# Altium PCB PCB1.PcbDoc
Units mm, origin at the board's own origin, x right, y up, seen from the top; angles counter-clockwise.
Board outline 50.18 x 50.38 mm, 2 copper layers (Top Layer, Bottom Layer); 24 components, 18 nets, 63 pads, 6 vias.
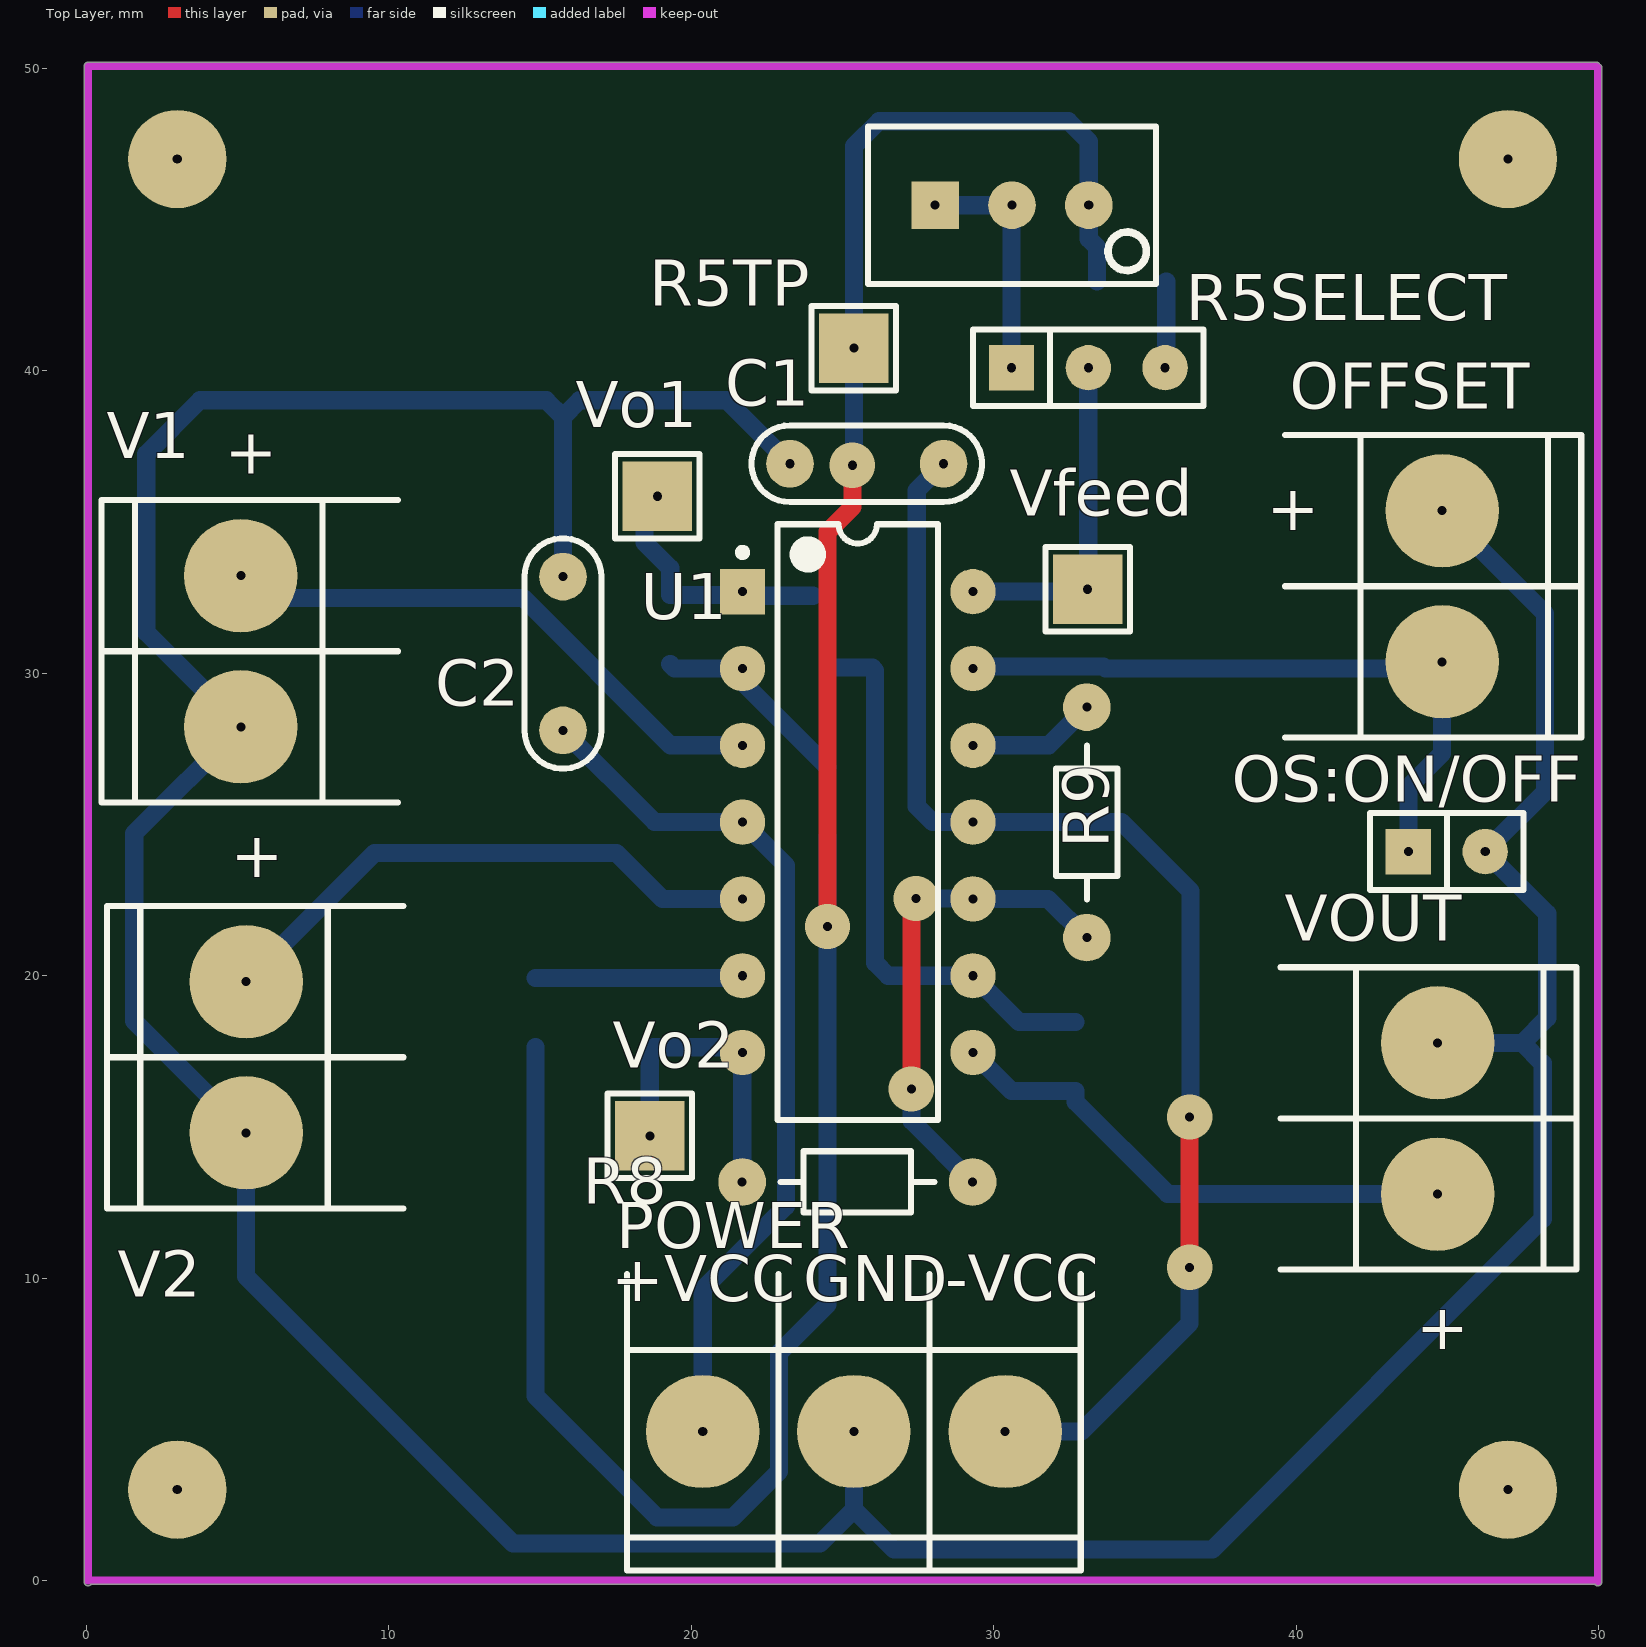
[diagram p0: Top Layer view]
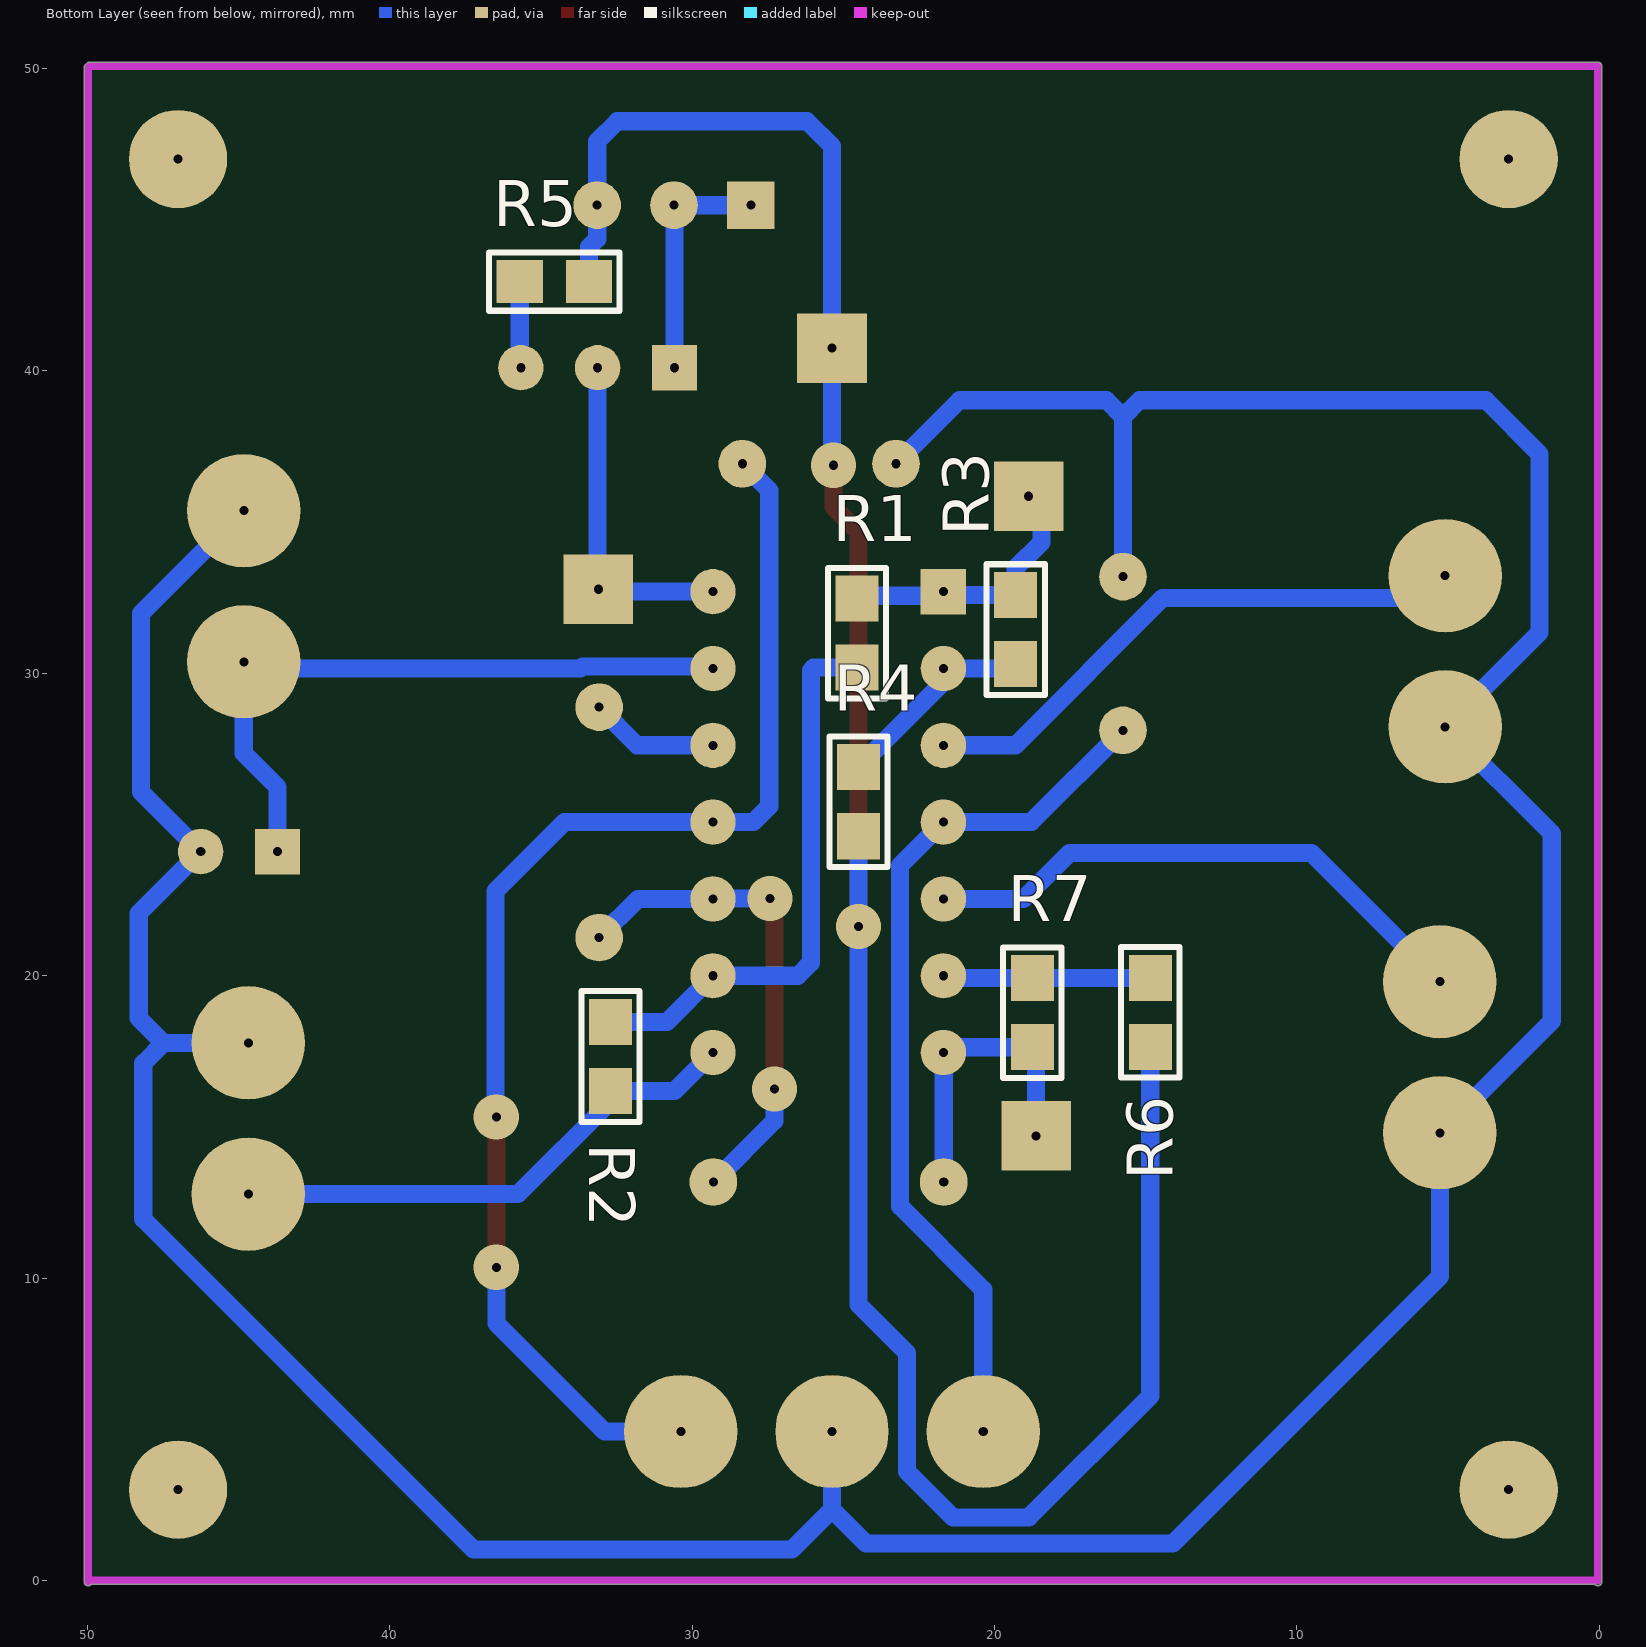
[diagram p1: Bottom Layer view, seen from below]
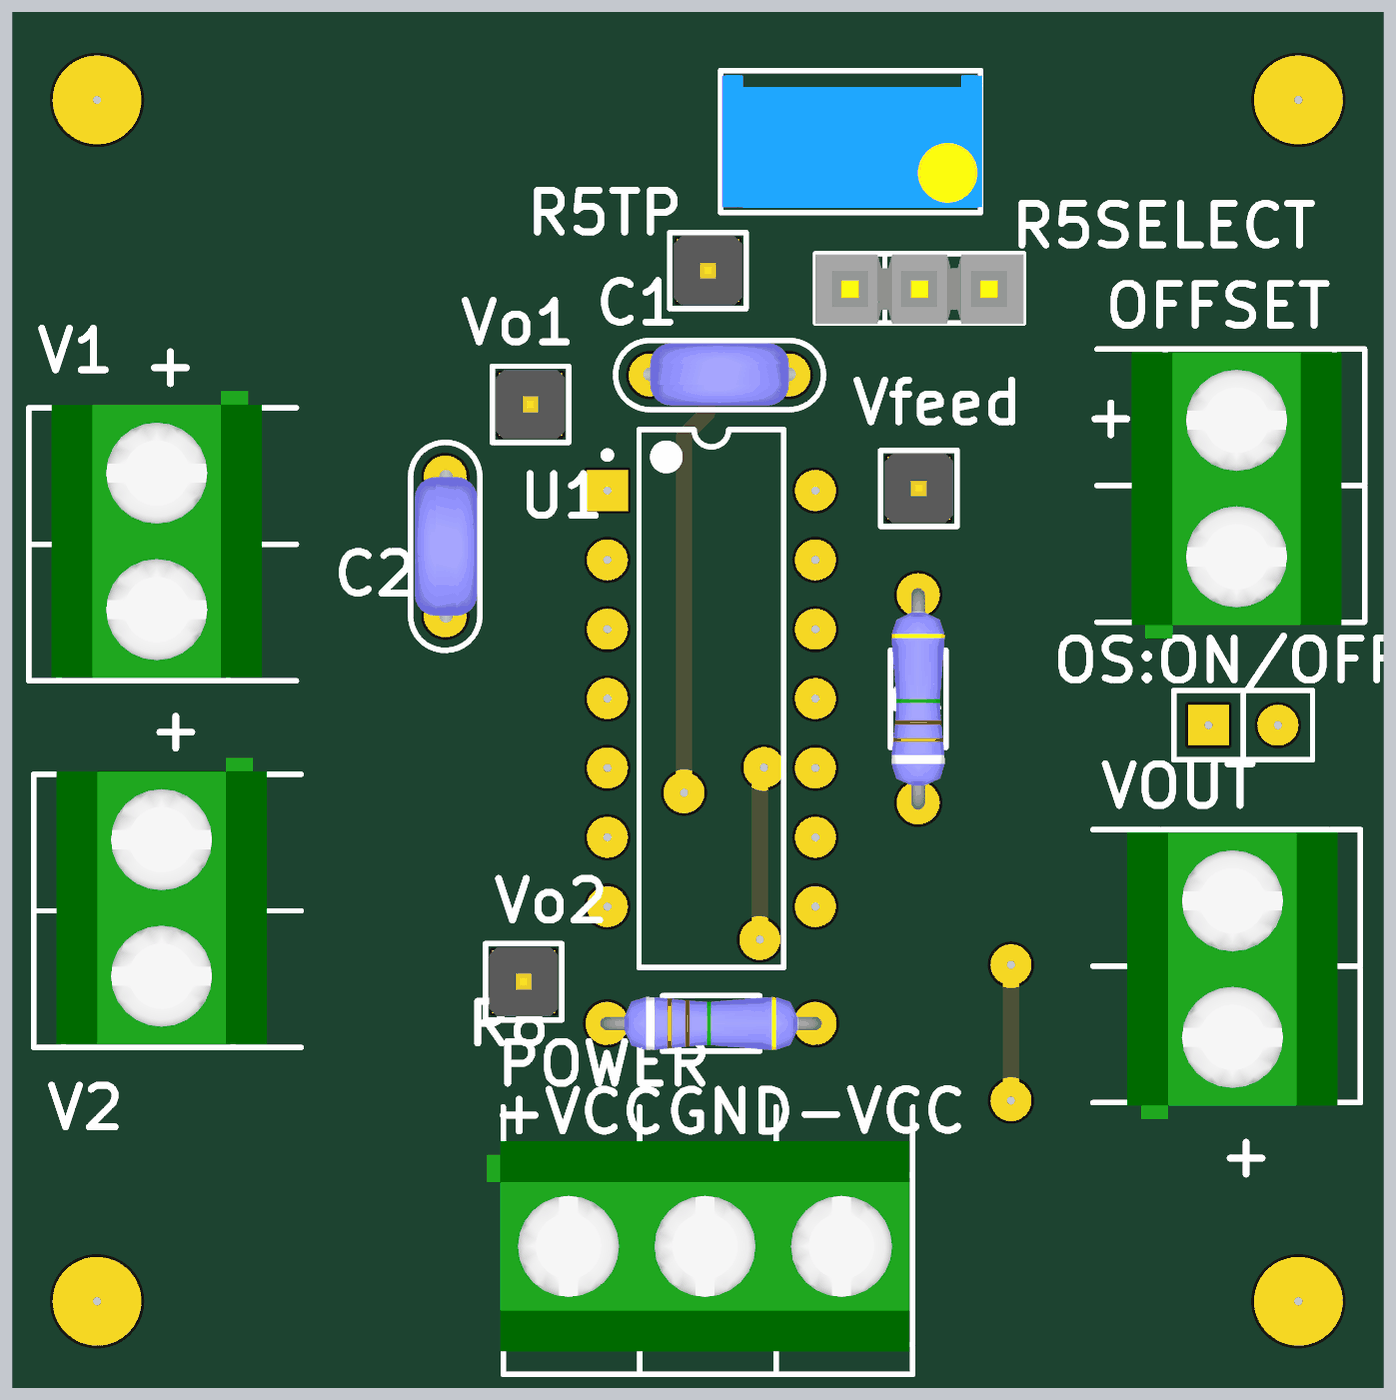
[diagram p2: 3D render of the assembled board from above, using the file's embedded part models]
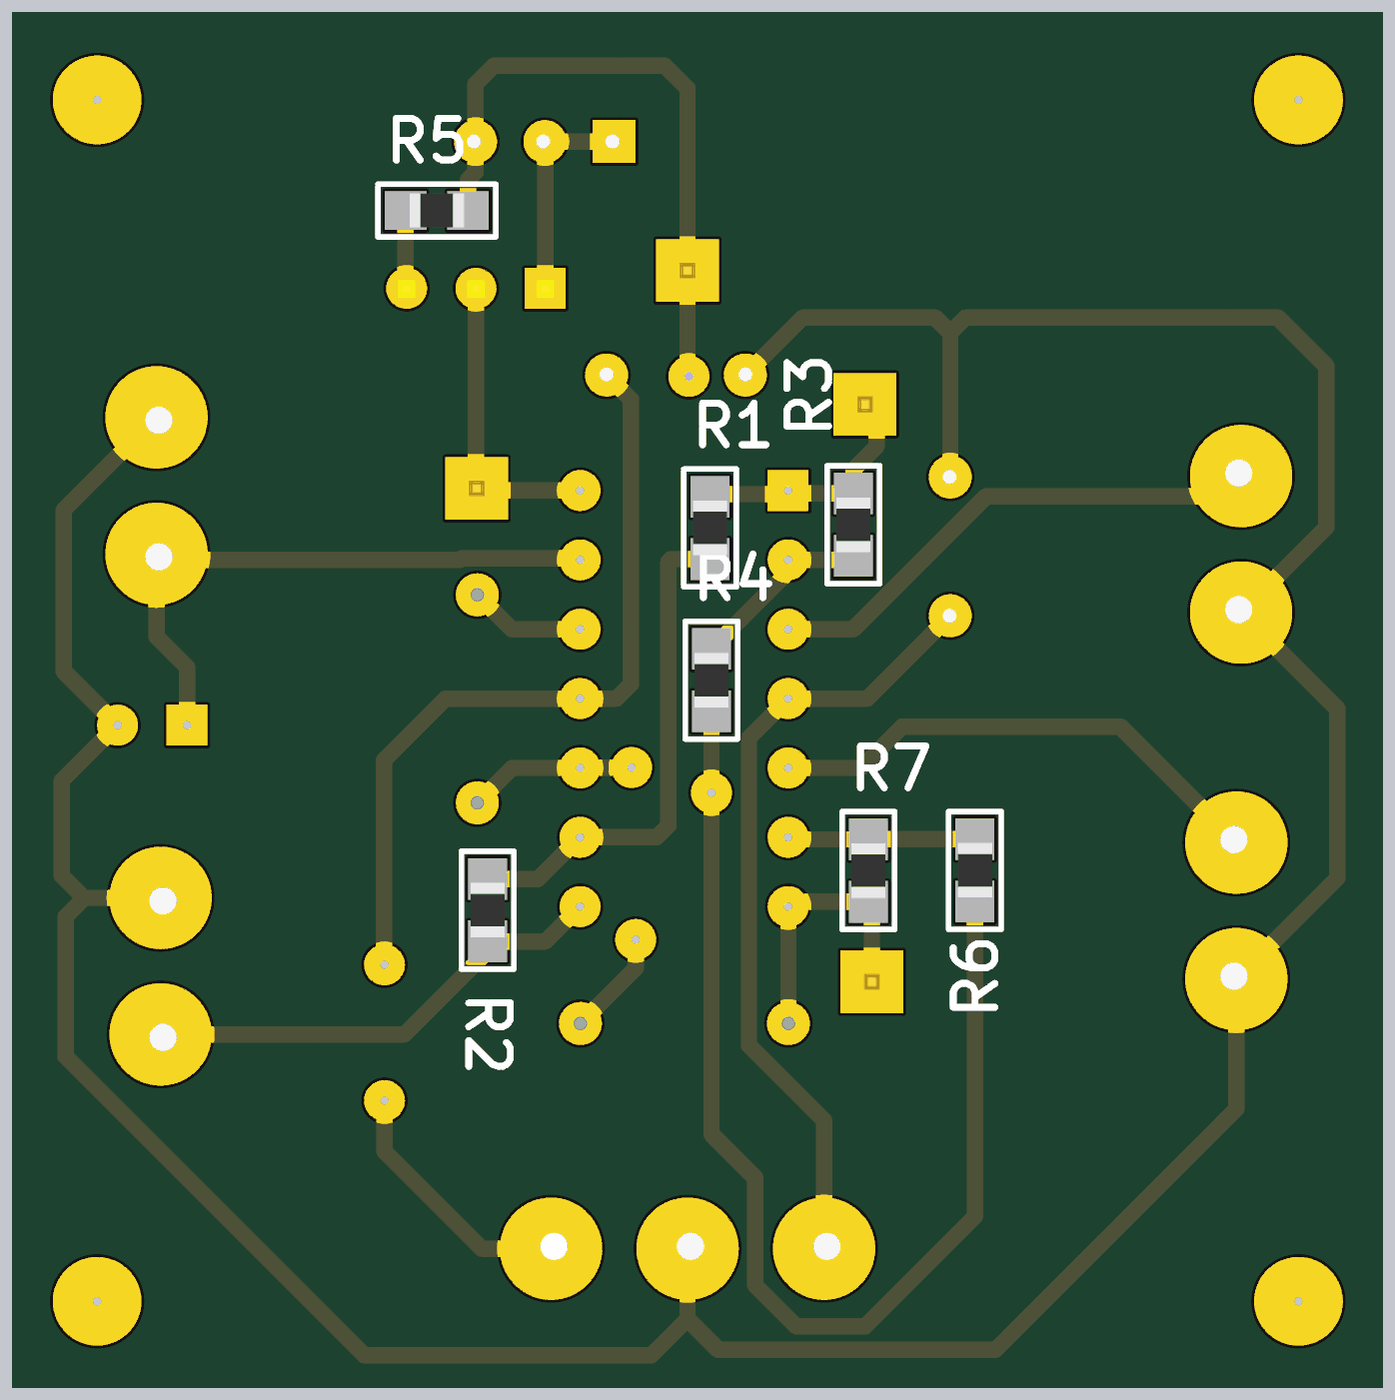
[diagram p3: 3D render of the assembled board from below, using the file's embedded part models]

## Layer stack, top to bottom
Top Solder: solder mask 0.0102, Solder Resist, Dk 3.5
Top Layer: signal copper 0.0356
Dielectric 1: dielectric 0.32, FR-4, Dk 4.8
Bottom Layer: signal copper 0.0356
Bottom Solder: solder mask 0.0102, Solder Resist, Dk 3.5

## Board outline
-0.077,-0.05 ccw(c0.05,-0.05) 0.151,-0.127 49.872,-0.127 49.885,-0.14 ccw(c49.975,-0.05) 50.102,-0.05 50.102,50.025 ccw(c49.975,50.025) 50.065,50.115 50.015,50.165 ccw(c49.925,50.075) 49.925,50.202 0.05,50.202 ccw(c0.05,50.075) -0.077,50.075

## Design rules (kind name [scope] priority, off if disabled: settings)
Clearance [All] p1: gap=0.254 ignorepadtopadclearanceinfootprint=FALSE except(0: Arc-Hole Track-Hole SMDPad-Hole THPad-Hole Via-Hole Fill-Hole Poly-Hole Region-Hole Text-Hole)
PolygonConnect [All] p1: connectstyle=Relief reliefconductorwidth=0.254 reliefentries=4 polygonreliefangle="90 Angle" airgapwidth=0.254
RoutingVias [All] p1: holewidth=0.711 width=1.27 viastyle="Through Hole" minholewidth=0.711 minwidth=1.27 maxholewidth=0.711 maxwidth=1.27
SolderMaskExpansion [All] p1: expansion=0.102
Width [All] p1: maxlimit=0.6 minlimit=0.6 preferedwidth=0.6
30 further rules are at their usual default settings.

## Components (designator, comment, footprint, x,y, rotation, side; value= is the part's Value field where it differs from the comment)
C1 "CAP" CAP200 25.8,36.925 r180 top
C2 "CAP" CAP200 15.754,30.65 r90 top
OFFSET "OFFSET" BORNERA2 44.825,32.875 r180 top
OS:ON/OFF "OS:ON/OFF" SIP2 44.98,24.1 r0 top
POWER "BORNERA 3" BORNERA3 25.375,4.925 r90 top
R1 "RES" 0805 24.55,31.325 r270 bottom
R2 "RES" 0805 32.7,17.325 r270 bottom
R3 "RES" 0805 19.3,31.443 r90 bottom
R4 "RES" 0805 24.5,25.75 r90 bottom
R5 "RES" 0805 34.557,42.95 r180 bottom
R5SELECT "POT/R5" SIP3 33.125,40.1 r0 top (schematic designator J5)
R5TP "TP" TPTH 25.375,40.75 r90 top
R6 "RES" 0805 14.85,18.782 r270 bottom
R7 "RES" 0805 18.75,18.775 r90 bottom
R8 "RES" RES300 21.68,13.175 r0 top
R9 "RES" RES300 33.075,21.255 r90 top
U1 "TL084ACN" TI-N14 25.501,25.075 r0 top locked
V1 "BORNERA 2" BORNERA2 5.1,30.725 r0 top
V2 "BORNERA 2" BORNERA2 5.275,17.3 r0 top
Vfeed "TP" TPTH 33.1,32.775 r90 top
Vo1 "TP" TPTH 18.875,35.85 r0 top
Vo2 "TP" TPTH 18.625,14.7 r0 top
VOUT "BORNERA 2" BORNERA2 44.675,15.275 r180 top
? "PRESET" "PRESET V" 30.6,45.475 r0 top

## Footprints (in the part's own frame and the unit in brackets; to place one, negate y for a bottom-side part, rotate by r counter-clockwise, add the part's x,y. Pads: shape width x height; smd on the part's side, far side on the other; paste and mask are expansions set on the pad)
0805 [mil] "Pasivo 0805"
  rect 60x56 smd: 1(-45,0) 2(45,0)
  silkscreen extent -85,-38 85,38, body extent -39,-25 39,25, height 15
BORNERA2 [mm] "Bornera con Tornillos 5mm separación"
  round 3.75 hole 0.3: 1(0,2.5) 2(0,-2.5)
  silkscreen extent -4.6,-5 5.2,5, body extent -3.76,-4.89 3.94,5.61, height 10
BORNERA3 [mm] "Bornera con Tornillos 5mm separación"
  round 3.75 hole 0.3: 1(0,5) 2(0,0) 3(0,-5)
  silkscreen extent -4.6,-7.5 5.2,7.5, body extent -3.76,-7.39 3.94,8.11, height 10.05
CAP200 [mil]
  round 62 hole 11.81: 1(-100,0) 2(100,0)
  silkscreen extent -150,-50 150,50, body extent -110,-46 110,44, height 246
"PRESET V" [mil]
  rect 62x62 hole 11.81: 1(-100,0)
  round 62 hole 11.81: 2(0,0) 3(100,0)
  silkscreen extent -188,-102 188,102, body extent -185,-95 190,95, height 455
RES300 [mil]
  round 62 hole 11.81: 1(0,0) 2(300,0)
  silkscreen extent 50,-40 250,40, body extent -10,-38 310,38, height 79
SIP2 [mm]
  rect 1.5x1.5 hole 0.3: 1(-1.27,0)
  round 1.5 hole 0.3: 2(1.27,0)
  silkscreen extent -2.54,-1.27 2.54,1.27
SIP3 [mm]
  rect 1.5x1.5 hole 0.3: 1(-2.54,0)
  round 1.5 hole 0.3: 2(0,0) 3(2.54,0)
  silkscreen extent -3.81,-1.27 3.81,1.27, body extent -3.81,-1.3 3.81,1.24, height 8.38
TI-N14 [mm] "DIP, 14-Leads, Body 19.305x6.35 mm, Pitch 2.54 mm"
  rect 1.5x1.5 hole 0.3: 1(-3.81,7.62)
  round 1.5 hole 0.3: 2(-3.81,5.08) 3(-3.81,2.54) 4(-3.81,0) 5(-3.81,-2.54) 6(-3.81,-5.08) 7(-3.81,-7.62) 8(3.81,-7.62) 9(3.81,-5.08) 10(3.81,-2.54) 11(3.81,0) 12(3.81,2.54) 13(3.81,5.08) 14(3.81,7.62)
  silkscreen extent -3.93,-9.85 2.65,9.85, body extent -3.3,-9.85 3.3,9.85, height 5.08
TPTH [mm]
  rect 2.3x2.3 hole 0.3: 1(0,0)
  silkscreen extent -1.4,-1.4 1.4,1.4, body extent -1.27,-1.27 1.27,1.27, height 6.04

## Part data
OFFSET: library part "BORNERA 2"
OS:ON/OFF: library part CON2
R5SELECT: library part CON3
U1: "JFET-Input Operational Amplifier, 7 to 36 V, 0 to 70 degC, 14-pin DIP (N14), Pb-Free (RoHS)", Manufacturer="Texas Instruments", Rating=Catalog, Supplier Part Number 1=296-1782-5-ND, Total Supply Voltage(Max)(+5V is 5, +/-5V is 10)=36, Total Supply Voltage(Min)(+5V is 5, +/-5V is 10)=7, CMRR(Min)(dB)=75, Code_JEDEC=MS-001, ComponentLink1Description="Manufacturer URL", ComponentLink1URL=http://www.ti.com/, ComponentLink2Description=Datasheet, ComponentLink2URL=http://www.ti.com/lit/ds/symlink/tl084a.pdf, ComponentLink3Description="Package Specification", ComponentLink3URL=http://www.ti.com/lit/ml/mpdi002c/mpdi002c.pdf, DatasheetVersion=SLOS081G, Eco-Plan="Pb-Free (RoHS)", GBW(Typ)(MHz)=3, IIB(Max)(pA)=200, Iq per channel(Max)(mA)=2.8, Mounting Technology="Through Hole", Number of Channels=4, Offset Drift(Typ)(uV/C)=18, PackageDescription="14-Pin Plastic In-Line, Body 19.305 x 6.35 mm, Pitch 2.54 mm", PackageReference=N14, PackageVersion="4040049/E, 12/2002", PartNumber=TL084ACN, Slew Rate(Typ)(V/us)=13, Sub Family="General Purpose Amplifier, High Supply Voltage Amplifier (>=30V)", Supplier 1=Digi-Key, Supplier 2=Farnell, Supplier 3=Newark, Supplier 4=Mouser, Supplier Part Number 2=1106129, Supplier Part Number 3=08F9361, Supplier Part Number 4=595-TL084ACN, Vio (25C)(Max)(mV)=6, Vn at 1kHz(Typ)(nV/rtHz)=18

## Free pads (board coordinates)
  round 3.25 hole 0.3: 3(3,47) 4(47,47) 5(47,3) 6(3,3)

## Via types
v1: diameter 1.5, hole 0.3, Top Layer to Bottom Layer, 6 vias

## Nets (pads, with @x,y where several pads share a name; then routed paths per layer and width w, separated by ;. In a path a pad name is that pad's centre, name@x,y a point inside that pad or via, vN(x,y) a via of type N, cw(c..) or ccw(c..) an arc to the next point about the centre after c; other vN are vias at no path point)
+VCC: C2.1 POWER.1 U1.4 | length 29.1
  Bottom Layer w0.6: C2.1 18.789,25.075 U1.4 23.125,23.641 23.125,12.375 20.375,9.625 POWER.1
-VCC: C1.1 POWER.3 U1.11 | length 43.8
  Top Layer w0.6: v1(36.475,10.35) v1(36.475,15.325) v1@36.5,15.35
  Bottom Layer w0.6: C1.1 27.45,36.035 27.45,25.6 27.975,25.075 U1.11@29.31,25.075 ; U1.11 34.225,25.075 36.5,22.8 v1@36.5,15.35 ; POWER.3 32.9,4.925 36.475,8.5 v1(36.475,10.35)
GND: C1.2 C2.2 OFFSET.2 OS:ON/OFF.2 POWER.2 V1.2 V2.2 VOUT.2 | length 144.1
  Bottom Layer w0.6: C2.2@15.75,33.825 15.75,38.475 ; C1.2 21.16,39.025 16.3,39.025 15.75,38.475 ; POWER.2 25.375,2.35 ; VOUT.2 47.475,17.775 ; OFFSET.2 48.225,31.975 48.225,26.075 OS:ON/OFF.2 48.3,22.05 48.3,18.6 47.475,17.775 ; 15.75,38.475 15.2,39.025 3.75,39.025 1.975,37.25 1.975,31.35 V1.2 1.575,24.7 1.575,18.5 V2.2 5.275,10.05 14.1,1.225 24.25,1.225 25.375,2.35 ; 25.375,2.35 26.7,1.025 37.225,1.025 48.15,11.95 48.15,17.1 47.475,17.775
Net_1: ?.1 ?.2 R5SELECT.1 | length 7.9
  Bottom Layer w0.6: ?.1 ?.2 30.585,45.46 R5SELECT.1
NetJ5_3: R5.1 R5SELECT.3 | length 2.9
  Bottom Layer w0.6: R5SELECT.3 35.7,40.135 R5.1
NetOFFSET_1: OFFSET.1 OS:ON/OFF.1 U1.13 | length 22.5
  Bottom Layer w0.6: U1.13@29.31,30.155 U1.13@29.31,30.216 ; U1.13 29.311,30.216 33.631,30.216 33.692,30.155 44.605,30.155 OFFSET.1 44.825,27.35 43.71,26.235 OS:ON/OFF.1
NetR1_2: R1.2 R2.1 U1.9 | length 18.7
  Bottom Layer w0.6: R1.2 25.982,30.182 26.075,30.089 26.075,20.425 26.505,19.995 29.31,19.995 30.837,18.468 R2.1
NetR3_1: R3.1 R4.2 U1.2 | length 6.9
  Bottom Layer w0.6: R3.1 19.445,30.155 U1.2@21.69,30.155 ; U1.2 21.691,29.702 R4.2
NetR6_1: R6.1 R7.2 U1.6 | length 6.9
  Bottom Layer w0.6: R6.1 18.743,19.925 R7.2 21.613,19.918 U1.6@21.69,19.995
NetR9_2: R9.2 U1.12 | length 4.3
  Bottom Layer w0.6: U1.12 31.815,27.615 R9.2
R5TP: ?.3 R4.1 R5.2 R5TP.1 R6.2 | length 82.8
  Top Layer w0.6: v1(24.5,21.625) 24.5,34.675 25.325,35.5 v1(25.325,36.875)
  Bottom Layer w0.6: R6.2 14.85,6.1 18.871,2.079 21.379,2.079 22.9,3.6 22.9,7.525 24.5,9.125 v1(24.5,21.625) R4.1 ; v1(25.325,36.875) 25.375,36.925 R5TP.1 25.375,47.425 26.2,48.25 32.475,48.25 33.14,47.585 ?.3 33.14,44.36 33.414,44.086 R5.2
U3+: R8.2 R9.1 U1.10 | length 16.5
  Top Layer w0.6: v1(27.275,16.25) 27.275,22.4 v1(27.425,22.55)
  Bottom Layer w0.6: v1(27.275,16.25) 27.275,15.2 R8.2 ; v1(27.425,22.55) 29.296,22.55 U1.10 31.795,22.535 R9.1
V1: U1.3 V1.1 | length 18.9
  Bottom Layer w0.6: V1.1 5.841,32.484 14.441,32.484 19.31,27.615 U1.3
V2: U1.5 V2.1 | length 18.8
  Bottom Layer w0.6: V2.1 9.525,24.05 17.525,24.05 19.04,22.535 U1.5
Vfeed: R5SELECT.2 U1.14 Vfeed.1 | length 11.2
  Bottom Layer w0.6: U1.14 33.02,32.695 Vfeed.1 33.125,32.8 R5SELECT.2
Vo1: R1.1 R3.2 U1.1 Vo1.1 | length 8.4
  Bottom Layer w0.6: Vo1.1@18.45,35.85 18.45,34.325 19.3,33.475 R3.2 21.581,32.586 21.69,32.695 21.824,32.561 R1.1@24.025,32.561
Vo2: R7.1 R8.1 U1.7 Vo2.1 | length 10.3
  Bottom Layer w0.6: Vo2.1 18.625,17.507 R7.1 21.513,17.632 21.69,17.455 21.68,17.445 R8.1
Vout: R2.2 U1.8 VOUT.1 | length 17.5
  Bottom Layer w0.6: U1.8@29.31,17.455 30.583,16.182 R2.2 32.7,15.828 35.753,12.775 VOUT.1

## Keep-outs
Keep-Out Layer:
  lines w0.254: 0.05,0 49.925,0 49.975,-0.05 49.975,50.025 49.925,50.075 0.05,50.075 0.05,0

## Silkscreen, mask and mechanical layers (free items; w line width, h text height)
Top Overlay:
  text "+" at 4.575,36.6 h1.52
  text "+" at 39.025,34.725 h1.52
  text "+" at 4.775,23.25 h1.52
  text "-VCC" at 28.4,9.25 h1.52
  text "+VCC" at 17.35,9.225 h1.52
  text "GND" at 23.7,9.225 h1.52
  text "+" at 43.975,7.65 h1.52